# Allegro board DevPack_Debug.brd
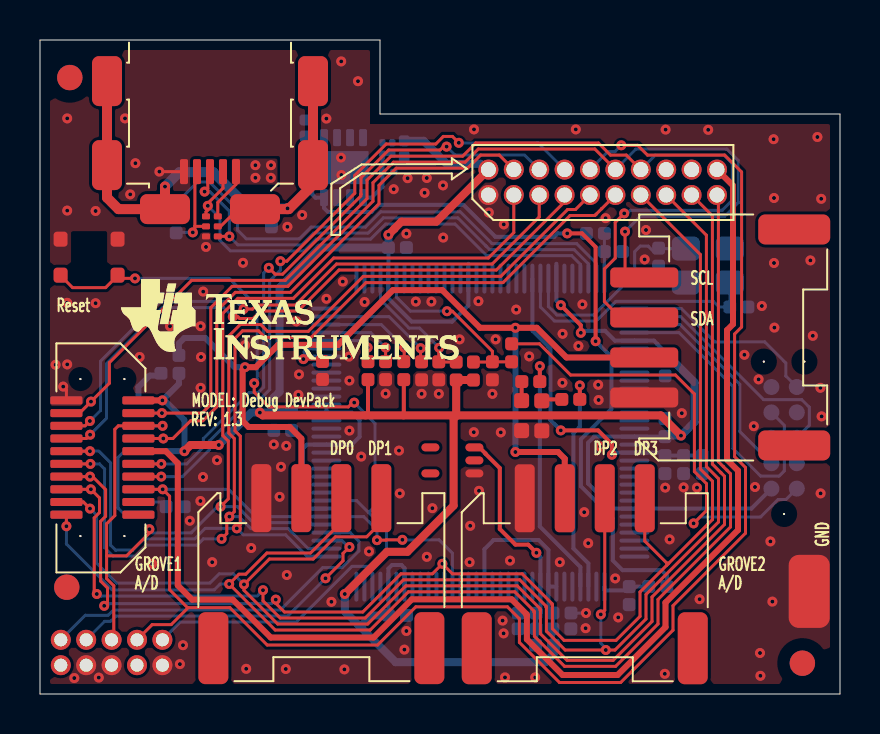
[diagram p0: board, top side]
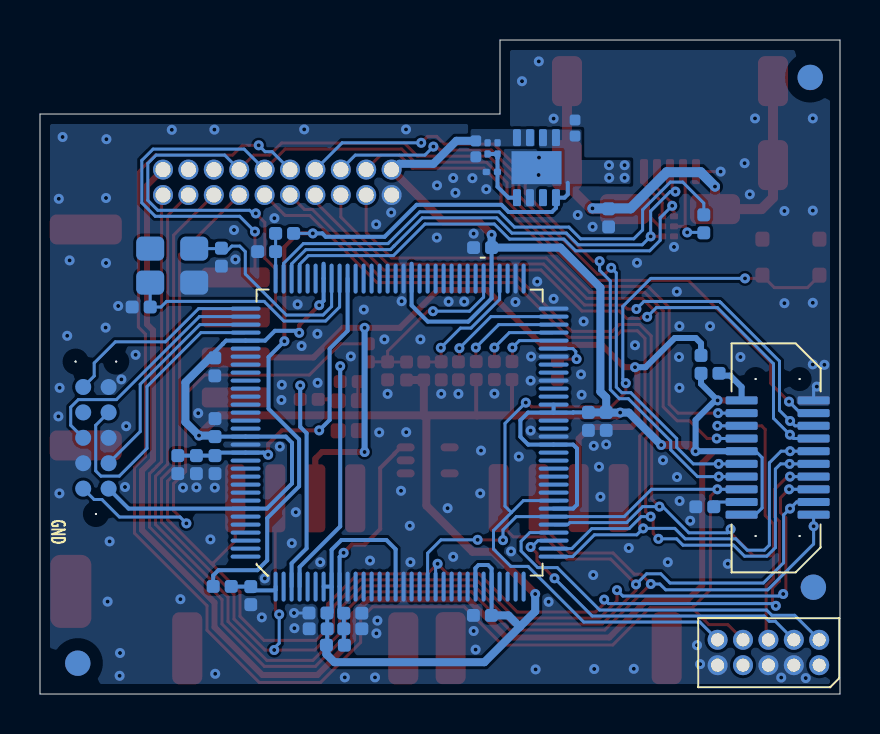
[diagram p1: board, bottom side, seen from below]

Outline 40 x 32.7 mm; copper layers: TOP, BOTTOM. Coordinates in mm from the lower left corner of the outline.
Outline path: 0,32.7 0,0 40,0 40,29 17,29 17,32.7 0,32.7

## Placement (name value [footprint] x y rotation side)
C1  10nF  [CAPC1005X60N]  17.43 3.93 0 bottom
C2  10nF  [CAPC1005X60N]  31.25 12.87 90 bottom
C3  10nF  [CAPC1005X60N]  31.26 16.81 270 bottom
C4  100nF  [CAPC1005X60N]  17.42 22.32 0 bottom
C5  100nF  [CAPC1005X60N]  12.58 14.08 270 bottom
C6  1uF  [CAPC1005X60N]  11.69 14.08 270 bottom
C7  0.1uF  [CAPC1005X60N]  31.25 11.92 270 bottom
C8  1uF  [CAPC1005X60N]  32.18 11.92 270 bottom
C9  2.2uF  [CAPC1005X60N]  33.11 11.92 270 bottom
C10  0.1uF  [CAPC1005X60N]  19.94 16.61 270 top
C11  1uF  [CAPC1005X60N]  25.64 3.26 0 bottom
C12  10nF  [CAPC1005X60N]  25.65 4.05 0 bottom
C13  12pF  [CAPC1005X60N]  34.49 19.35 0 bottom
C14  12pF  [CAPC1005X60N]  30.93 22.29 270 bottom
C15  10nF  [CAPC1005X60N]  24.81 3.26 180 bottom
C16  100nF  [CAPC1005X60N]  24.81 4.04 180 bottom
C17  2.2uF  [CAPC1005X60L]  13.25 27.9 90 bottom
C18  15pF  [CAPC0603X35L]  17.62 27.56 270 bottom
C19  2.2uF  [CAPC1005X60L]  18.21 27.66 270 bottom
C20  100nF  [CAPC1005X60N]  28.22 22.12 0 bottom
CR1  LS L296-P2Q2-1  [LEDC1708X67L]  25.09 13.16 90 top
CR2  LPL296-J2L2-25  [LEDC1707X65L]  24.08 13.17 90 top
CR3  TPD4E004DRY  [SON50P100X145X60-6N]  8.3 23.88 270 top
FIDU1  FIDU_1.27mm  [FID127X142]  1.49 30.82 0 top
FIDU2  FIDU_1.27mm  [FID127X142]  38.12 1.54 0 top
FIDU3  FIDU_1.27mm  [FID127X142]  1.34 5.34 0 top
FIDU4  FIDU_1.27mm  [FID127X142]  1.49 30.83 180 bottom
FIDU5  FIDU_1.27mm  [FID127X142]  1.33 5.34 180 bottom
FIDU6  FIDU_1.27mm  [FID127X142]  38.11 1.54 180 bottom
J1  LSS-110-01-F-DV-A-TR  [SAMTEC_LSS-110-01-F-DV-A-TR-20N]  1.32 14.68 0 bottom
J2  BB02-CN102-KB8-000000  [GRADCONN_BB02CN102KB8B]  1.04 1.44 90 bottom
J3  47491-0001  [MOLEX_474910001N]  9.8 26.12 90 top
J4  LSS-110-01-F-DV-A-TR  [SAMTEC_LSS-110-01-F-DV-A-TR-20N]  4.92 14.68 180 top
NOREF  -  []  0 30.1 0 top
NOREF#2  -  []  39.64 0 90 top
NOREF#3  -  []  17.56 29 90 top
NOREF#4  -  []  0 31.95 0 top
P1  TC2050-IDC-NL  [TAGCONNECT_TC2050IDCNLN]  36.57 10.27 90 bottom
P2  FTS-110-02-L-D  [SAMTEC_FTS11002LD-20B]  22.42 24.95 0 top
P3  1125R-SMT-4P  [TAIFENG_1125RSMT4PN]  11.07 9.79 270 top
P4  1125R-SMT-4P  [TAIFENG_1125RSMT4PN]  30.21 14.83 0 top
P5  1125R-SMT-4P  [TAIFENG_1125RSMT4PN]  24.24 9.79 270 top
R1  750k  [RESC1005X40N]  7.21 9.36 180 bottom
R2  51  [RESC1005X40N]  20.81 16.6 270 top
R3  10k  [RESC1005X40N]  21.67 16.6 270 top
R4  1k  [RESC1005X40N]  24.78 2.44 0 bottom
R6  33k  [RESC1005X40N]  11.57 23.36 90 bottom
R7  0  [RESC1005X40N]  6.81 23.06 90 bottom
R8  680  [RESC1005X40N]  26.09 14.73 0 top
R9  120  [RESC1005X40N]  24.09 15.62 0 top
R10  1k  [RESC1005X40N]  19.08 15.71 90 top
R11  1k  [RESC1005X40N]  18.19 15.72 90 top
R12  1k  [RESC1005X40N]  17.28 16.62 270 top
R13  330k  [RESC1005X40N]  30.44 5.38 0 bottom
R14  220k  [RESC1005X40N]  29.46 4.47 90 bottom
R15  100  [RESC1005X40N]  23.58 16.61 90 top
R16  DNM  [RESC1005X40N]  22.62 15.71 90 top
R17  1k  [RESC1005X40N]  16.4 16.62 270 top
R18  4.87k  [RESC1005X40N]  14.13 15.73 90 top
R19  0  [RESC1005X40AN]  6.95 16.03 90 bottom
R20  51k  [RESC0603X35L]  17.12 27 90 bottom
R21  30.1k  [RESC0603X35L]  17.69 26.1 180 bottom
R22  100  [RESC1005X40N]  27.32 23.03 0 bottom
SW1  TL3700AF160Q  [SW_TL3700AF160Q_A2L]  3.88 22.74 180 top
TP1  S1751-06  [TP_S1750]  38.46 5.13 90 top
U1  TM4C1294NCPDTT3R  [QFP40P1600X1600X120-128N]  28.22 5.37 180 bottom
U2  TPS79601DR  [SON65P300X300X100-9AL]  14.2 27.82 0 bottom
U3  LM4040B25IDCK  [SOT65P210X110-5N]  21.72 11.03 90 top
UNK#REFDES  -  []  5.05 20.74 0 top
Y1  16MHz  [OSCCC250X320X100-4BN]  34.49 20.57 180 bottom

## Library data of the parts
C1-C16 C20 = CAPACITOR: User Part Number: #PN; alternate symbols: (CAPC1005X60L,CAPC1005X60M)
C17 C19 = CAPACITOR: alternate symbols: (CAPC1005X60L,CAPC1005X60M)
C18 = CAPACITOR: alternate symbols: (CAPC0603X35L,CAPC0603X35M)
CR1 = LED: alternate symbols: (LEDC1708X67L,LEDC1708X67M)
CR2 = LED: alternate symbols: (LEDC1707X65L,LEDC1707X65M)
CR3 = DIODE_TPD4E004_SON6: User Part Number: #PN; alternate symbols: (SON50P100X145X65-6L,SON50P100X145X65-6M)
FIDU1-FIDU6 = FIDMARK
J1 J4 = CONN_SOCKET_2X10_J_V1: alternate symbols: (SAMTEC_LSS-110-01-F-DV-A-TR-20L,SAMTEC_LSS-110-01-F-DV-A-TR-20M)
J2 = CONN_HEADER_2X5_J_V1: User Part Number: #PN
J3 = CONN_USB_MICRO_5+6_S: User Part Number: #PN; alternate symbols: (MOLEX_474910001L,MOLEX_474910001M)
P1 = CONN_IDC_TC2050-IDC-NL: User Part Number: #PN; alternate symbols: (TAGCONNECT_TC2050IDCNLL,TAGCONNECT_TC2050IDCNLM)
P2 = CONN_HEADER_2X10_P_S: alternate symbols: (SAMTEC_FTS11002LD-20C,SAMTEC_FTS11002LD-20A)
P3-P5 = CONN_HEADER_4_P_2MH_V1: User Part Number: #PN; alternate symbols: (TAIFENG_1125RSMT4PL,TAIFENG_1125RSMT4PM)
R1-R4 R6-R18 R22 = RESISTOR: alternate symbols: (RESC1005X40L,RESC1005X40M)
R19 = RESISTOR_3PORTS: alternate symbols: (RESC1005X40AL,RESC1005X40AM,RESC1005X40BL,RESC1005X40BM)
R20 R21 = RESISTOR: alternate symbols: (RESC0603X35L,RESC0603X35M)
SW1 = SWITCH_TACT_V1: User Part Number: #PN; alternate symbols: (SW_TL3700AF160Q_A2L,SW_TL3700AF160Q_A2M)
TP1 = TEST_POINT
U1 = IC_PROC_TM4C1294NCPDT_TQFP128: alternate symbols: (QFP40P1600X1600X120-128L,QFP40P1600X1600X120-128M)
U2 = IC_PM_TPS79601_SON8: alternate symbols: (SON65P300X300X100-9AL,SON65P300X300X100-9AM)
U3 = IC_REF_LM4040_SC70-5: alternate symbols: (SOT65P210X110-5L,SOT65P210X110-5M)
Y1 = XTAL_4: alternate symbols: (OSCCC250X320X100-4BL,OSCCC250X320X100-4BM)

## Footprints (pads in the part's own frame, mm; a bottom-side part is the same pattern mirrored in y, then rotated)
CAPC0603X35L
  custom 0.36x0.32 smd: 1(0,0) 2(0.56,0)
CAPC1005X60L
  custom 0.55x0.54 smd: 1(0,0) 2(0.8,0)
CAPC1005X60N
  custom 0.65x0.64 smd: 1(0,0) 2(0.9,0)
FID127X142
  round 1.27 smd: 1(0,0)
GRADCONN_BB02CN102KB8B
  round 1 hole 0.65: 1(0,0) 2(1.27,0) 3(0,1.27) 4(1.27,1.27) 5(0,2.54) 6(1.27,2.54) 7(0,3.81) 8(1.27,3.81) 9(0,5.08) 10(1.27,5.08)
LEDC1707X65L
  custom 0.75x0.75 smd: 1(0,0) 2(1.5,0)
LEDC1708X67L
  custom 0.75x0.75 smd: 1(0,0) 2(1.5,0)
MOLEX_474910001N
  custom 1.25x0.4 smd: 1(0,0) 2(0,0.65) 3(0,1.3) 4(0,1.95) 5(0,2.6)
  custom 2.5x1.5 smd: 6(4.525,-3.85) 7(0.325,-3.85) 10(0.325,6.45) 11(4.525,6.45)
  custom 1.5x2.5 smd: 8(-1.875,-0.95) 9(-1.875,3.55)
OSCCC250X320X100-4BN
  custom 1.4x1.2 smd: 1(0,0) 2(2.2,0) 3(2.2,1.7) 4(0,1.7)
QFP40P1600X1600X120-128N
  oval 0.2x1.5 smd: 1(0,0) 2(0.4,0) 3(0.8,0) 4(1.2,0) 5(1.6,0) 6(2,0) 7(2.4,0) 8(2.8,0) 9(3.2,0) 10(3.6,0) 11(4,0) 12(4.4,0) 13(4.8,0) 14(5.2,0) 15(5.6,0) 16(6,0) 17(6.4,0) 18(6.8,0) 19(7.2,0) 20(7.6,0) 21(8,0) 22(8.4,0) 23(8.8,0) 24(9.2,0) 25(9.6,0) 26(10,0) 27(10.4,0) 28(10.8,0) 29(11.2,0) 30(11.6,0) 31(12,0) 32(12.4,0) 65(12.4,15.4) 66(12,15.4) 67(11.6,15.4) 68(11.2,15.4) 69(10.8,15.4) 70(10.4,15.4) 71(10,15.4) 72(9.6,15.4) 73(9.2,15.4) 74(8.8,15.4) 75(8.4,15.4) 76(8,15.4) 77(7.6,15.4) 78(7.2,15.4) 79(6.8,15.4) 80(6.4,15.4) 81(6,15.4) 82(5.6,15.4) 83(5.2,15.4) 84(4.8,15.4) 85(4.4,15.4) 86(4,15.4) 87(3.6,15.4) 88(3.2,15.4) 89(2.8,15.4) 90(2.4,15.4) 91(2,15.4) 92(1.6,15.4) 93(1.2,15.4) 94(0.8,15.4) 95(0.4,15.4) 96(0,15.4)
  oval 1.5x0.2 smd: 33(13.9,1.5) 34(13.9,1.9) 35(13.9,2.3) 36(13.9,2.7) 37(13.9,3.1) 38(13.9,3.5) 39(13.9,3.9) 40(13.9,4.3) 41(13.9,4.7) 42(13.9,5.1) 43(13.9,5.5) 44(13.9,5.9) 45(13.9,6.3) 46(13.9,6.7) 47(13.9,7.1) 48(13.9,7.5) 49(13.9,7.9) 50(13.9,8.3) 51(13.9,8.7) 52(13.9,9.1) 53(13.9,9.5) 54(13.9,9.9) 55(13.9,10.3) 56(13.9,10.7) 57(13.9,11.1) 58(13.9,11.5) 59(13.9,11.9) 60(13.9,12.3) 61(13.9,12.7) 62(13.9,13.1) 63(13.9,13.5) 64(13.9,13.9) 97(-1.5,13.9) 98(-1.5,13.5) 99(-1.5,13.1) 100(-1.5,12.7) 101(-1.5,12.3) 102(-1.5,11.9) 103(-1.5,11.5) 104(-1.5,11.1) 105(-1.5,10.7) 106(-1.5,10.3) 107(-1.5,9.9) 108(-1.5,9.5) 109(-1.5,9.1) 110(-1.5,8.7) 111(-1.5,8.3) 112(-1.5,7.9) 113(-1.5,7.5) 114(-1.5,7.1) 115(-1.5,6.7) 116(-1.5,6.3) 117(-1.5,5.9) 118(-1.5,5.5) 119(-1.5,5.1) 120(-1.5,4.7) 121(-1.5,4.3) 122(-1.5,3.9) 123(-1.5,3.5) 124(-1.5,3.1) 125(-1.5,2.7) 126(-1.5,2.3) 127(-1.5,1.9) 128(-1.5,1.5)
RESC0603X35L
  custom 0.36x0.32 smd: 1(0,0) 2(0.56,0)
RESC1005X40AN
  custom 0.64x0.65 smd: 1(0,-0.9)
  custom 0.65x0.64 smd: 2(0,0) 3(0.9,0)
RESC1005X40N
  custom 0.65x0.64 smd: 1(0,0) 2(0.9,0)
SAMTEC_FTS11002LD-20B
  round 1 hole 0.75: 1(0,0) 2(0,1.27) 3(1.27,0) 4(1.27,1.27) 5(2.54,0) 6(2.54,1.27) 7(3.81,0) 8(3.81,1.27) 9(5.08,0) 10(5.08,1.27) 11(6.35,0) 12(6.35,1.27) 13(7.62,0) 14(7.62,1.27) 15(8.89,0) 16(8.89,1.27) 17(10.16,0) 18(10.16,1.27) 19(11.43,0) 20(11.43,1.27)
SAMTEC_LSS-110-01-F-DV-A-TR-20N
  round 0.1 hole 0.9 unplated: (2.9,6.782) (2.9,-1.067)
  custom 1.6x0.4 smd: 1(0,0) 2(3.6,0) 3(0,0.635) 4(3.6,0.635) 5(0,1.27) 6(3.6,1.27) 7(0,1.905) 8(3.6,1.905) 9(0,2.54) 10(3.6,2.54) 11(0,3.175) 12(3.6,3.175) 13(0,3.81) 14(3.6,3.81) 15(0,4.445) 16(3.6,4.445) 17(0,5.08) 18(3.6,5.08) 19(0,5.715) 20(3.6,5.715)
SON50P100X145X60-6N
  custom 0.3x0.4 smd: 1(0,0) 2(0.5,0) 3(1,0) 4(1,0.59) 5(0.5,0.59) 6(0,0.59)
SON65P300X300X100-9AL
  custom 0.4x0.85 smd: 1(0,0) 2(0.65,0) 3(1.3,0) 4(1.95,0) 5(1.95,3) 6(1.3,3) 7(0.65,3) 8(0,3)
  rect 2.5x1.65 smd: 9(0.975,1.5)
SOT65P210X110-5N
  oval 0.4x0.9 smd: 1(0,0) 2(0.65,0) 3(1.3,0) 4(1.3,2.2) 5(0,2.2)
SW_TL3700AF160Q_A2L
  custom 0.7x0.75 smd: 1(0,0) 2(2.85,0) 3(0,1.8) 4(2.85,1.8)
TAGCONNECT_TC2050IDCNLN
  round 0.1 hole 1 unplated: (-1.27,0.635) (6.35,-0.38) (6.35,1.65)
  round 0.8 smd: 1(0,0) 2(1.27,0) 3(2.54,0) 4(3.81,0) 5(5.08,0) 6(5.08,1.27) 7(3.81,1.27) 8(2.54,1.27) 9(1.27,1.27) 10(0,1.27)
TAIFENG_1125RSMT4PN
  custom 3.4x1 smd: 1(0,0) 2(0,2) 3(0,4) 4(0,6)
  custom 3.6x1.5 smd: M1(7.5,-2.4) M2(7.5,8.4)
TP_S1750
  custom 3.65x2.05 smd: 1(0,0)

## Nets
GND: C1.2 C2.2 C3.2 C4.2 C5.2 C6.2 C7.2 C8.2 C9.2 C10.2 C11.2 C12.2 C13.2 C14.2 C15.2 C16.2 C17.2 C19.2 C20.2 CR1.1(C) CR2.1(C) CR3.3 J1.1 J2.3 J2.5 J2.9 J3.5(GND#5) J4.2 P1.3(7) P1.5(8) P1.9(10) P2.1 P3.1 P4.1 P5.1 R1.1 R6.1 R10.1 R12.2 R14.1 R16.1 R18.1 R21.1 SW1.1 SW1.2 TP1.1 U1.10(GNDA) U1.17(GND#17) U1.48(GND#48) U1.55(GND#55) U1.58(GND#58) U1.64(NWAKE) U1.66(XOSC0) U1.80(GND#80) U1.114(GND#114) U2.6(GND) U2.9(GND/TAB) U3.1(ANODE) Y1.2(GND)
VBUS_DETECT: R13.1 R14.2 U1.1(PD0/AIN15)
VDD: J1.2 R19.1
VDDC: C7.1 C8.1 C9.1 U1.87(VDDC#87) U1.115(VDDC#115)
DEVPACK_VDD: J4.9 P2.20
DP0: J1.19 J4.20 P2.19 P3.3
DP1: J1.17 J4.18 P2.17 P3.4
DP2: J1.15 J4.16 P2.15 P5.3
DP3: J1.13 J4.14 P2.13 P5.4 U1.21(PK3/AIN19)
DP6/AUDIO DO: J1.7 J4.8 P2.7
DP7/AUDIO_CLK: J1.5 J4.6 P2.5
DP9/MISO: J1.14 J4.13 P2.8
DP10/MOSI: J1.12 J4.11 P2.6
DP11/CSN: J1.8 J4.7 P2.4
DP_ID: J1.18 R1.2
GROVE VDD: P3.2 P4.2 P5.2 R19.3
IRSTN: P1.10(5) R15.2
ITCK: P1.4(2) U1.100(PC0/TCK/SWCLK)
ITDI: P1.8(4) U1.98(PC2/TDI)
ITDO: P1.6(3) U1.97(PC3/TDO/SWO)
ITMS: P1.2(1) U1.99(PC1/TMS/SWDIO)
LED0: R8.2 U1.3(PD2/AIN13)
LED1: R9.2 U1.4(PD3/AIN12)
SCL: J1.4 J4.3 P2.12 P4.4
SDA: J1.3 J4.4 P2.14 P4.3
VREFA+: C15.1 C16.1 R4.1 U1.9(VREFA+) U3.3(CATHODE)
XDSET_DM: CR3.1 J3.2(D-) U1.93(PL7/USB0DM)
XDSET_DP: CR3.4 J3.3(D+) U1.94(PL6/USB0DP)
XDSET_ID: CR3.2 J3.4(ID) R7.1
XDSET_RESET: J2.10 SW1.3 SW1.4 U1.40(PA6)
XDSET_RXD: J1.9 J4.10 P2.11 U1.33(PA0/U0RX)
XDSET_SHEILD: CR3.5 J3.6(GND#6) J3.7(GND#7) J3.8(GND#8) J3.9(GND#9) J3.10(GND#10) J3.11(GND#11) R6.2
XDSET_TCK: J2.4 U1.35(PA2/SSI0CLK)
XDSET_TDI: J1.16 J2.8 J4.15 P2.10 U1.20(PK2/AIN18) U1.38(PA5/SSI0XDAT1)
XDSET_TDO: J1.6 J2.6 J4.5 P2.3 U1.37(PA4/SSI0XDAT0)
XDSET_TMS: J2.2 U1.36(PA3/SSI0FSS)
XDSET_TXD: J1.11 J4.12 P2.9 U1.34(PA1/U0TX)
XDSET_VBUS: C17.1 CR3.6 J3.1(VBUS) R13.2 R22.1 U2.1(IN#1) U2.2(IN#2) U2.8(EN)
XDSET_VCC: C1.1 C2.1 C3.1 C4.1 C5.1 C6.1 C11.1 C12.1 C18.1 C19.1 J1.10 J1.20 J4.1 P1.1(6) P2.2 R2.2 R3.2 R4.2 R11.1 R17.2 R19.2 R20.2 U1.7(VDD#7) U1.8(VDDA) U1.16(VDD#16) U1.26(VDD#26) U1.28(VDD#28) U1.39(VDD#39) U1.47(VDD#47) U1.51(VDD#51) U1.52(VDD#52) U1.69(VDD#69) U1.79(VDD#79) U1.90(VDD#90) U1.101(VDD#101) U1.113(VDD#113) U1.122(VDD#122) U2.3(OUT#3) U2.4(OUT#4)
N632836: C10.1 R2.1 U1.68(VBAT)
N634757: R3.1 R15.1 R16.2 U1.70(NRST)
N637362: C13.1 U1.88(OSC0) Y1.1
N637369: C14.1 U1.89(OSC1) Y1.3
N653652: C20.1 R22.2 U1.96(PB1/USB0VBUS)
N653706: R7.2 U1.95(PB0/USB0ID)
N654664: CR1.2(A) R8.1
N654708: CR2.2(A) R9.1
N655244: R10.2 U1.63(PK4)
N655248: R11.2 U1.62(PK5)
N655252: R12.1 U1.61(PK6)
N686578: R17.1 U1.60(PK7)
N726237: R18.2 U1.59(RBIAS)
N743940: C18.2 R20.1 R21.2 U2.5(FB)

Pads without a net: FIDU1 1; FIDU2 1; FIDU3 1; FIDU4 1; FIDU5 1; FIDU6 1; J2 1 7; J4 17 19; P1 7; P2 16 18; P3 M1 M2; P4 M1 M2; P5 M1 M2; U1 2 5 6 11 12 13 14 15 18 19 22 23 24 25 27 29 30 31 32 41 42 43 44 45 46 49 50 53 54 56 57 65 67 71 72 73 74 75 76 77 78 81 82 83 84 85 86 91 92 102 103 104 105 106 107 108 109 110 111 112 116 117 118 119 120 121 123 124 125 126 127 128; U2 7; U3 2 4 5; Y1 4

## Via types
v1: diameter 0.5, hole 0.2, TOP to BOTTOM, 225 vias

## Routing (per net, layer and track width the routed paths; a pad name or vN(x,y) marks a point on that pad's centre or on a via; arc(x,y) is an arc through that point)
GND: length 3.7
  TOP w0.15: 6.88,1.44 6.93,1.49 v1(7,1.49) ; J3.5 v1(5.97,26.12) ; v1(1.16,15.37) 1.32,15.21 J4.2
  BOTTOM w0.15: C12.2 v1(27.3,4.05) ; 27.35,7.58 27.39,7.54 v1(27.41,7.54) ; J4.2 1.32,15.21 v1(1.16,15.37)
  vias: v1(0.78,16.46) v1(1.36,28.78) v1(1.36,24.17) v1(1.36,19.56) v1(1.36,16.48) v1(1.71,0.8) v1(2.78,24.15) v1(2.78,19.54) v1(2.94,0.82) v1(4.25,28.78) v1(4.51,24.98) v1(4.77,26.54) v1(4.98,16.85) v1(5.61,6.51) v1(6.5,18.39) v1(7.15,2.44) v1(7.49,8.66) v1(8.03,18.39) v1(8.03,15.31) v1(8.02,9.65) v1(8.05,16.85) v1(8.16,20.12) v1(8.15,10.85) v1(8.3,22.35) v1(8.61,6.59) v1(8.85,11.69) v1(10.15,21.56) v1(10.25,17.44) v1(10.31,1.26) v1(10.56,7.3) v1(11.69,12.48) v1(11.98,9.86) v1(12.05,11.36) v1(12.31,12.41) v1(12.34,5.95) v1(12.29,1.25) v1(12.37,23.36) v1(12.82,18.63) v1(12.95,15.98) v1(12.92,14.96) v1(13.11,23.95) v1(14.32,28.77) v1(14.32,19.76) v1(14.57,4.61) v1(15.06,31.63) v1(15.05,26.82) v1(15.07,25.95) v1(15.14,20.62) v1(15.22,1.23) v1(15.45,16.87) v1(15.47,15.67) v1(15.47,13.17) v1(15.9,30.64) v1(16.06,11.87) v1(16.23,19.6) v1(16.45,7.13) v1(17.28,15.02) v1(17.69,25.24) v1(17.95,12.17) v1(17.99,10.03) v1(18.22,2.22) v1(18.32,23.02) v1(18.32,3.15) v1(18.38,25.79) v1(18.79,19.62) v1(19.08,15.01) v1(19.23,25.06) v1(19.34,25.8) v1(19.34,6.86) v1(19.57,19.62) v1(19.62,9.29) v1(19.94,15.01) v1(20.15,25.43) v1(20.16,22.82) v1(20.98,17.73) v1(21.51,8.41) v1(21.48,6.59) v1(21.7,28.23) v1(21.69,13.09) v1(21.92,19.64) v1(21.95,10.16) v1(22.44,24.07) v1(22.62,15.01) v1(22.78,17.73) v1(23.04,13.08) v1(23.13,3.67) v1(23.19,23.48) v1(23.18,3.03) v1(23.25,0.83) v1(23.5,6.67) v1(23.81,19.22) v1(24.46,16.88) v1(24.76,0.83) v1(25.99,6.59) v1(26.13,18.01) v1(26.12,15.56) v1(26.79,28.23) v1(26.92,17.4) v1(27.12,19.48) v1(27.21,9.09) v1(27.28,3.29) v1(27.91,15.46) v1(27.93,14.7) v1(28.01,12.37) v1(28.28,23.79) v1(28.76,5.78) v1(28.91,3.83) v1(30.23,21.73) v1(30.3,23.2) v1(31.24,1.01) v1(31.28,28.22) v1(31.26,10.32) v1(31.48,7.73) v1(32.09,14.04) v1(32.18,10.33) v1(32.85,10.32) v1(32.98,4.74) v1(33.41,28.21) v1(35.22,16.96) v1(35.69,13.39) v1(35.75,10.35) v1(35.93,15.73) v1(36,2.05) v1(36.02,0.91) v1(36.09,19.4) v1(36.52,7.63) v1(36.62,4.62) v1(36.68,27.74) v1(36.7,24.8) v1(36.7,21.55) v1(36.72,18.32) v1(38.52,21.68) v1(38.64,17.91) v1(38.87,27.85) v1(39.02,15.31) v1(39.03,10.03) v1(39.06,24.76) v1(39.08,13.88)
VBUS_DETECT: length 2.6
  BOTTOM w0.2: 30.43,5.37 R14.2 29.27,5.18 28.25,5.18 28.22,5.21 U1.1 ; 30.43,5.37 30.51,5.37 30.52,5.38 ; 30.43,5.37 R13.1
VDD: length 2.1
  BOTTOM w0.3: R19.1 5.94,15.92 5.49,15.92 4.92,15.35 J1.2
VDDC: length 16.2
  TOP w0.2: v1(28.59,11.96) 28.59,12.49 27.91,13.18 v1(26.04,13.18)
  BOTTOM w0.2: v1(28.59,11.96) 28.71,11.96 28.82,12.07 U1.115 31.1,12.07 C7.1 C8.1 C9.1 ; v1(26.04,13.18) 25.52,13.7 25.52,17.26 24.62,18.16 U1.87
DEVPACK_VDD: length 62.9
  TOP w0.3: J4.9 6.29,12.14 6.89,11.54 6.89,5.43 7.6,4.72 9.64,4.72 11.53,2.83 16.68,2.83 18.59,4.74 23.58,4.74 24.33,3.99 24.33,3.93 24.34,3.92 24.34,2.73 26.13,0.95 28.88,0.95 31.28,3.35 31.28,4.57 34.9,8.2 34.9,8.51 34.9,8.76 34.9,11.17 34.35,11.72 34.35,18.19 34.65,18.49 34.65,25.42 P2.20
DP0: length 68.9
  TOP w0.15: J4.20 v1(1.32,8.39) ; P3.3 15.07,8.59 13.53,7.05 11.35,7.05 10.29,5.99 9.95,5.99 v1(9.46,5.5) 11.76,3.2 16.51,3.2 18.42,5.11 23.74,5.11 24.7,4.14 24.7,4.09 24.72,4.07 24.72,2.89 26.23,1.38 28.78,1.38 30.9,3.5 30.9,4.73 34.53,8.35 34.53,8.6 34.52,8.6 34.52,11.01 34.35,11.19 34.17,11.36 33.92,11.62 33.92,24.88 P2.19 33.85,24.93
  BOTTOM w0.15: v1(9.46,5.5) 9.01,5.5 8.72,5.21 3.61,5.21 1.32,7.5 v1(1.32,8.39) J4.20
DP1: length 71.8
  TOP w0.15: v1(2.5,9.27) 2.17,9.6 J4.18 ; P2.17 33.62,23.91 33.62,11.49 34.05,11.06 34.23,10.89 34.23,8.48 30.6,4.85 30.6,3.63 28.65,1.68 26.35,1.68 25.02,3.01 25.02,4.2 25.01,4.21 25.01,4.27 23.86,5.41 18.3,5.41 16.39,3.5 11.88,3.5 10.2,5.18 v1(10.2,5.48) 11.47,6.75 13.66,6.75 14.77,7.86 16.34,7.86 17.07,8.59 P3.4
  BOTTOM w0.15: v1(10.2,5.48) 9.67,6.01 8.96,6.01 8.5,5.55 3.83,5.55 2.82,6.56 2.82,8.95 v1(2.5,9.27) 2.17,9.6 J4.18
DP2: length 71.7
  TOP w0.15: v1(28.04,3.98) 28.04,3.99 28.24,4.19 P5.3 ; P2.15 33.32,22.94 33.32,11.37 33.92,10.76 33.92,8.6 30.3,4.98 30.3,3.75 28.75,2.2 v1(28.29,2.2) 26.26,2.2 25.32,3.14 25.32,4.32 25.31,4.34 25.31,4.39 23.99,5.71 18.17,5.71 16.26,3.8 12.01,3.8 11.15,4.66 v1(11.15,5.19) ; J4.16 v1(2.54,10.23) 2.98,9.8 2.98,9.07 2.71,8.81 2.71,5.16 2.84,5.03 v1(2.84,5)
  BOTTOM w0.15: v1(28.04,3.98) 28.04,2.54 28.29,2.29 v1(28.29,2.2) ; J4.16 v1(2.54,10.23) ; v1(2.84,5) 2.97,5 3.07,4.9 10.86,4.9 v1(11.15,5.19)
DP3: length 69.7
  TOP w0.15: J4.14 v1(2.5,10.87) 2.63,10.87 3.28,10.22 3.28,8.88 3.03,8.63 3.03,5.65 3.38,5.3 3.38,4.58 v1(3.21,4.41) ; 31.44,6.54 33.62,8.72 33.62,10.64 33.02,11.24 33.02,21.97 P2.13 ; 31.44,6.54 31.34,6.54 30.24,7.65 P5.4 ; 31.44,6.54 31.34,6.44 30,5.1 30,3.88 28.8,2.68 26.2,2.68 25.62,3.26 25.62,4.45 25.61,4.46 25.61,4.51 24.11,6.01 20.62,6.01 v1(20.12,6.51) 19.62,6.01 18.05,6.01 16.14,4.1 12.22,4.1 11.79,4.53 v1(11.79,4.72)
  BOTTOM w0.15: v1(20.12,6.51) 20.22,6.41 U1.21 ; v1(11.79,4.72) 11.77,4.72 11.57,4.52 3.32,4.52 v1(3.21,4.41) ; J4.14 v1(2.5,10.87)
DP6/AUDIO DO: length 33.5
  TOP w0.15: v1(9.64,18.86) 9.9,18.86 9.98,18.77 10.65,18.77 11.03,19.15 12.9,19.15 14.95,21.2 22.82,21.2 26.23,24.61 P2.7 ; v1(2.5,12.96) 2.31,12.78 J4.8
  BOTTOM w0.15: J4.8 2.31,12.78 v1(2.5,12.96) 3.33,13.79 3.33,16.52 6.13,19.32 9.18,19.32 v1(9.64,18.86)
DP7/AUDIO_CLK: length 32.1
  TOP w0.15: v1(10.18,19.25) 10.63,19.25 10.83,19.45 12.78,19.45 14.83,21.5 22.61,21.5 24.96,23.85 P2.5 ; v1(2.49,13.65) 2.49,13.65 2.25,13.41 J4.6
  BOTTOM w0.15: v1(10.18,19.25) 9.8,19.63 6.03,19.63 5.98,19.58 5.97,19.58 3.02,16.64 3.02,14.18 v1(2.49,13.65) 2.49,13.65 2.25,13.41 J4.6
DP9/MISO: length 34.4
  TOP w0.15: J4.13 v1(6.06,10.87) ; v1(12.02,21.64) 12.34,21.64 15.74,25.04 15.74,25.93 17.31,27.5 19.79,27.5 20.17,27.88 20.62,27.88 v1(20.94,27.56)
  BOTTOM w0.15: J4.13 v1(6.06,10.87) 7.12,10.87 8.46,12.21 8.46,12.65 10.58,14.76 11.03,14.76 11.48,15.22 11.48,20.65 12.02,21.19 v1(12.02,21.64) ; v1(20.94,27.56) 24.89,27.56 P2.8
DP10/MOSI: length 32.6
  TOP w0.15: J4.11 v1(6.07,11.51) ; v1(11.44,21.31) 11.76,20.99 12.13,20.99 16.04,24.9 16.04,24.98 16.05,24.99 16.05,25.82 17.43,27.2 20,27.2 20.17,27.37 v1(20.33,27.37)
  BOTTOM w0.15: v1(11.44,21.31) 11.19,21.05 11.19,15.34 10.91,15.06 10.46,15.06 8.16,12.77 8.16,12.33 7.34,11.51 v1(6.07,11.51) J4.11 ; v1(20.33,27.37) 20.75,26.95 24.23,26.95 P2.6
DP11/CSN: length 29.5
  TOP w0.15: P2.4 22.96,26.95 22.03,26.95 21.38,26.29 17.81,26.29 16.95,25.43 16.95,24.51 12.52,20.08 9.77,20.08 8.84,19.16 8.84,14.36 8.14,13.66 7.53,13.66 6.64,12.78 v1(6.17,12.78) J4.7
  BOTTOM w0.15: J4.7 v1(6.17,12.78)
DP_ID: length 1.7
  BOTTOM w0.15: J1.18 6.34,9.6 6.31,9.57 R1.2
GROVE VDD: length 47.4
  TOP w0.3: P5.2 26.24,11.76 25.9,12.1 v1(23.77,12.1) ; P4.2 26.32,16.83 24.84,18.31 v1(23.77,18.31) 22,18.31 20.11,20.2 17.64,20.2 14.9,17.45 11.9,17.45 10.79,16.34 v1(10.25,16.34) 10.13,16.22 10.13,13.65 10.43,13.35 12.49,13.35 13.07,12.77 P3.2
  BOTTOM w0.3: v1(23.77,12.1) v1(23.77,18.31) ; R19.3 6.95,17.53 7.21,17.8 8.26,17.8 9.72,16.34 v1(10.25,16.34)
IRSTN: length 23
  TOP w0.15: R15.2 24.97,17.51 26.53,15.95 31.77,15.95 32.72,15 32.72,11.12 33.33,10.51 33.33,9.18 v1(32.68,8.53)
  BOTTOM w0.15: v1(32.68,8.53) 33,8.85 36.03,8.85 36.9,9.72 37.3,9.72 P1.10
ITCK: length 15.6
  BOTTOM w0.15: P1.4 37.22,13.44 37.22,11.15 36.95,10.89 36.03,10.89 34.65,12.28 34.65,15.37 31.95,18.07 U1.100
ITDI: length 12.4
  BOTTOM w0.15: U1.98 32.03,18.87 36.18,14.72 38.08,14.72 38.47,14.34 38.47,13.44 P1.8
ITDO: length 10.1
  BOTTOM w0.15: P1.6 37.29,15.9 37.29,16.55 36.23,17.61 33.73,17.61 32.07,19.27 U1.97
ITMS: length 11.1
  BOTTOM w0.15: U1.99 32.01,18.47 34.99,15.49 34.99,13.12 P1.2
LED0: length 11.2
  TOP w0.2: v1(26.99,15.43) R8.2
  BOTTOM w0.2: v1(26.99,15.43) 26.99,13.36 26.67,13.04 26.67,7.28 27.42,6.53 U1.3
LED1: length 12.6
  TOP w0.2: R9.2 v1(24.99,16.39)
  BOTTOM w0.2: U1.4 27.02,6.35 24.99,8.38 v1(24.99,16.39)
SCL: length 52.6
  TOP w0.15: J4.3 v1(6.1,14.04) 8.1,14.04 8.54,14.49 8.54,19.32 9.6,20.38 12.39,20.38 12.39,20.39 12.4,20.39 16.65,24.64 16.65,25.57 17.67,26.59 21.25,26.59 21.91,27.25 27.74,27.25 P2.12 ; v1(29.25,23.12) 29.25,20.98 29.4,20.83 P4.4
  BOTTOM w0.15: v1(29.25,23.12) 30.02,23.89 33.99,23.89 34.23,23.88 34.91,24.56 34.91,26.68 34.34,27.25 29.8,27.25 P2.12 ; v1(6.1,14.04) J4.3
SDA: length 57.2
  TOP w0.15: P4.3 29.01,18.83 28.22,19.62 28.22,21.25 28.76,21.79 28.76,23.58 v1(29.21,24.03) ; J4.4 1.98,14.04 v1(2.55,14.62) 3.47,15.54 3.47,16.57 7.58,20.68 12.26,20.68 16.35,24.77 16.35,25.69 17.55,26.89 21.13,26.89 21.79,27.55 27.92,27.55 28.52,26.95 29.32,26.95 P2.14
  BOTTOM w0.15: v1(2.55,14.62) 1.98,14.04 J4.4 ; v1(29.21,24.03) 29.36,24.03 29.52,24.18 34.11,24.18 34.61,24.68 34.61,26.53 34.2,26.95 30.77,26.95 P2.14
VREFA+: length 12
  TOP w0.2: v1(24.82,7.06) 24.41,7.47 23.77,7.47 22.99,8.25 22.99,11.3 22.27,12.01 22.27,12.03 21.97,12.33 U3.3
  BOTTOM w0.15: 25.02,4.06 25,4.04 C16.1
  BOTTOM w0.2: R4.1 24.78,2.58 24.81,2.61 C15.1 C16.1 ; v1(24.82,7.06) 25.02,6.86 U1.9 25.02,4.06
XDSET_DM: length 24.9
  TOP w0.15: J3.2 9.15,25.29 8.39,24.53 v1(8.39,24.41) 8.39,24.2 8.3,24.11 CR3.1
  BOTTOM w0.15: v1(8.39,24.41) 8.99,23.81 8.99,22.68 9.52,22.16 13.22,22.16 13.8,22.75 16.53,22.75 17.28,23.5 20.75,23.5 22.33,21.92 26.58,21.92 27.02,21.48 U1.93
XDSET_DP: length 25
  TOP w0.15: J3.3 8.49,26.12 8.39,26.02 8.39,25.27 8.24,25.12 v1(8.23,25.12) ; CR3.4 v1(9.47,22.88)
  BOTTOM w0.15: U1.94 27.42,21.51 26.71,22.22 22.48,22.22 22.3,22.4 20.89,23.81 17.17,23.81 16.4,23.05 13.68,23.05 13.09,22.46 9.89,22.46 v1(9.47,22.88) 9.47,24.14 8.49,25.12 v1(8.23,25.12)
XDSET_ID: length 4.6
  TOP w0.15: 7.74,23.39 7.75,23.38 CR3.2 ; 7.74,23.39 7.74,26.01 J3.4 ; 7.74,23.39 7.74,23.18 v1(7.64,23.08)
  BOTTOM w0.15: v1(7.64,23.08) 6.83,23.08 ; 6.83,23.08 6.78,23.08 6.74,23.04 ; 6.83,23.08 R7.1
XDSET_RESET: length 44.8
  TOP w0.15: v1(4.75,20.78) 4.04,20.78 SW1.3 3.88,20.92 3.28,20.32 1.63,20.32 1.03,20.92 SW1.4 ; v1(15.71,14.57) 15.63,14.57 15.41,14.36 11.44,14.36 10.71,15.09 v1(10.71,15.54)
  BOTTOM w0.15: v1(15.71,14.57) 16.75,13.53 16.75,9.39 16.43,9.07 ; v1(10.71,15.54) 10.71,15.59 10.86,15.74 10.86,19.38 9.46,20.78 v1(4.75,20.78) ; J2.10 7.01,3.6 12.82,3.6 15.6,6.38 16.46,6.38 17.32,7.25 17.32,8.18 16.43,9.07 ; 16.43,9.07 15.83,9.67 U1.40 14.04,9.67
XDSET_RXD: length 51.6
  TOP w0.15: v1(9.84,8.28) 10.02,8.46 10.02,12.9 9.75,13.16 9.75,17.78 10.13,18.16 10.93,18.16 11.26,17.83 13.56,17.83 16.3,20.57 23.15,20.57 26.5,23.93 27.75,23.93 27.8,23.98 27.8,23.99 28.08,24.27 P2.11 ; J4.10 v1(2.5,12.14)
  BOTTOM w0.15: U1.33 13.37,6.87 12.28,7.96 10.16,7.96 v1(9.84,8.28) 8.26,8.28 7.74,7.76 5.21,7.76 4.64,7.19 3.78,7.19 3.53,7.44 3.53,11.56 2.95,12.14 v1(2.5,12.14) J4.10
XDSET_SHEILD: length 28.1
  TOP w0.15: J3.8 9.89,24.25 9.03,23.38 CR3.5
  TOP w0.5: 12.34,24.25 v1(12.38,24.28) ; 12.34,24.25 12.44,24.25 13.65,25.46 J3.7 13.65,30.64 ; 12.34,24.25 J3.8 ; v1(6.25,25.37) J3.9 3.92,24.25 3.35,24.82 J3.10 3.35,30.64
  BOTTOM w0.5: v1(6.25,25.37) 6.97,26.09 8.66,26.09 10.47,24.28 11.59,24.28 ; v1(12.38,24.28) 11.59,24.28 ; 11.59,24.28 R6.2
XDSET_TCK: length 17.1
  TOP w0.15: v1(15.47,7.35) 15.15,7.03 15.15,6.66 v1(14.28,5.79)
  BOTTOM w0.15: v1(14.28,5.79) 12.39,3.9 3.8,3.9 3.53,3.63 3.23,3.63 J2.4 2.31,2.76 2.39,2.84 ; 13.94,7.67 U1.35 15.1,7.67 15.42,7.35 v1(15.47,7.35)
XDSET_TDI: length 92.5
  TOP w0.15: 7.41,4.32 7.38,4.32 6.48,5.21 6.48,9.89 v1(6.13,10.23) J4.15 ; 7.41,4.32 9.49,4.32 11.36,2.45 16.88,2.45 18.79,4.36 23.37,4.36 23.97,3.76 23.97,2.89 23.97,2.58 25.97,0.57 29.03,0.57 31.65,3.19 31.65,4.42 35.28,8.04 35.28,8.35 35.28,8.66 35.28,8.66 35.28,8.91 35.27,11.32 34.73,11.87 34.73,18 35.08,18.35 35.08,26.1 34.23,26.95 30.38,26.95 29.89,27.43 v1(29.07,27.43) ; 7.41,4.32 6.56,3.47 5.61,3.47 J2.8 ; v1(18.12,7.71) 17.32,7.71 17.3,7.69 v1(16.85,7.69)
  BOTTOM w0.15: v1(18.12,7.71) 19.95,7.71 20.62,7.04 U1.20 ; P2.10 28.4,27.12 28.75,27.12 v1(29.07,27.43) ; v1(16.85,7.69) 16.85,8.21 16.19,8.87 U1.38 10.79,8.87 9.43,10.23 v1(6.13,10.23) J4.15
XDSET_TDO: length 55.3
  TOP w0.15: v1(5.47,8.24) 5.47,8.05 4.33,6.91 3.33,6.91 ; J2.6 3.58,2.79 3.69,2.9 3.69,5.41 3.33,5.77 3.33,6.91 ; v1(6.13,13.41) J4.5 3.92,13.41 3.74,13.23 3.74,8.92 3.33,8.51 3.33,6.91 ; P2.3 23.69,23.07 22.42,21.8 14.68,21.8 12.67,19.78 9.89,19.78 9.14,19.03 9.14,13.4 9.14,12.92 9.41,12.65 9.41,9.76 v1(9.03,9.37)
  BOTTOM w0.15: v1(5.47,8.24) 5.47,8.21 5.62,8.06 7.56,8.06 8.87,9.37 v1(9.03,9.37) 9.87,9.37 10.67,8.57 13.51,8.57 13.61,8.47 U1.37 ; J4.5 v1(6.13,13.41)
XDSET_TMS: length 19
  BOTTOM w0.15: 14.31,8.07 U1.36 15.51,8.07 15.95,7.63 15.95,7.15 15.11,6.32 14.14,6.32 12.02,4.2 3.67,4.2 3.41,3.94 2.27,3.94 J2.2
XDSET_TXD: length 50.8
  TOP w0.15: v1(9.08,7.76) 9.34,8.02 9.34,8.74 v1(9.47,8.87) 9.71,9.12 9.71,12.77 9.44,13.05 9.44,17.9 10.01,18.48 11.04,18.48 11.38,18.13 13.41,18.13 16.16,20.88 23.04,20.88 26.38,24.23 26.77,24.23 P2.9 ; v1(2.52,11.51) J4.12
  BOTTOM w0.15: v1(9.08,7.76) 8.17,7.76 7.85,7.44 5.32,7.44 4.77,6.89 3.66,6.89 3.23,7.32 3.23,11.25 2.97,11.51 v1(2.52,11.51) J4.12 ; U1.34 13.41,7.27 12.41,8.27 10.54,8.27 9.94,8.87 v1(9.47,8.87)
XDSET_VBUS: length 41
  TOP w0.15: J3.1 9.8,25.49 8.89,24.58 CR3.6
  TOP w0.2: v1(27.78,17.64) 27.78,22.35 27.1,23.03 v1(26.36,23.03)
  BOTTOM w0.15: v1(26.36,23.03) R22.1
  BOTTOM w0.2: 13.61,25.56 13.61,24.98 13.78,24.82 U2.8 14.2,24.3 14.4,24.1 16.57,24.1 16.93,24.46 21.17,24.46 22.77,22.86 25.71,22.86 25.88,23.03 v1(26.36,23.03) ; v1(27.78,17.64) 28.57,16.85 28.57,14.26 27.05,12.73 27.05,10.38 28.64,8.79 28.64,6.68 29.13,6.19 31.08,6.19 31.34,5.93 R13.2
  vias: v1(10.77,26.44) v1(10.77,25.81) v1(11.54,25.81) v1(11.55,26.44)
XDSET_VCC: length 165.3
  TOP w0.2: 16.27,13.93 16.4,14.06 R17.2 ; v1(26.04,19.44) 27.04,18.44 v1(27.04,18.06) ; R11.1 18.19,13.95 18.17,13.93
  TOP w0.3: J4.1 v1(6.12,14.68)
  TOP w0.4: 20.84,13.93 31.04,13.93 v1(32.05,12.92) ; 20.84,13.93 20.81,13.96 R2.2 R3.2 ; 20.84,13.93 11.13,13.93 v1(10.99,14.07) ; 20.84,13.93 20.68,13.77 20.68,9.42 18.37,7.11 17.35,7.11 v1(15.24,5) ; v1(17.42,22.96) 17.72,23.26 17.72,23.27 18.07,23.62 19.82,23.62 P2.2 ; v1(8.94,12.45) 7.53,12.45 v1(7.22,12.14) 7.25,12.14
  BOTTOM w0.15: J1.20 4.23,8.96 3.9,9.3 3.9,11.82 4.21,12.14 J1.10 ; 25.42,4.06 25.43,4.05 C12.1 ; 11.68,14.07 C6.1
  BOTTOM w0.2: U1.51 U1.52 ; U1.51 13.34,14.07 13.33,14.08 C5.1 ; U1.51 15.6,14.07 15.98,13.69 15.98,12.86 15.59,12.47 U1.47 13.34,12.47 13.15,12.28 13.15,9.46 13.34,9.27 U1.39 ; U1.26 18.23,5.38 18.23,6.29 18.07,6.45 17.6,6.45 17.42,6.27 U1.28 17.42,3.94 C1.1 ; C3.1 31.26,17.1 30.86,17.5 30.86,17.51 30.7,17.67 U1.101 28.74,17.67 28.25,18.16 27.14,18.16 v1(27.04,18.06) ; R4.2 25.64,2.48 C11.1 25.64,4.04 C12.1 ; C4.1 U1.69 17.42,19.78 18.58,18.62 20.61,18.62 21.42,19.43 U1.79 21.42,21.52 ; C2.1 U1.113 27.71,12.87 27.4,12.56 27.4,10.53 28.66,9.27 U1.122 35.57,9.27 P1.1 ; 25.82,21.52 U1.90 25.82,19.66 v1(26.04,19.44) ; U1.8 U1.7 ; U1.8 25.42,7.21 24.93,7.7 22.68,7.7 22.22,7.24 U1.16 ; U1.8 25.42,4.06
  BOTTOM w0.3: R19.2 6.95,15.51 v1(6.12,14.68) 6.24,14.68 7.22,13.7 v1(7.22,12.14) J1.10
  BOTTOM w0.4: C5.1 11.92,14.08 11.91,14.07 v1(10.99,14.07) 10.56,14.07 v1(8.94,12.45) ; C3.1 31.5,16.81 32.73,15.58 32.73,13.6 v1(32.05,12.92) 31.3,12.92 C2.1 ; C6.1 11.69,14.82 11.98,15.11 11.98,20.32 13.98,22.32 C4.1 v1(17.42,22.96) ; P2.2 22.32,26.22 22.03,26.51 20.33,26.51 19.18,27.66 C19.1 ; C1.1 16.58,3.93 16.01,3.36 ; 16.01,3.36 15.24,4.13 v1(15.24,5) ; 16.01,3.36 17.78,1.59 25.28,1.59 25.68,1.99 R4.2
N632836: length 6.6
  TOP w0.15: R2.1 19.95,16.6 C10.1 19.94,17.19 19.96,17.21 v1(19.96,17.31)
  BOTTOM w0.15: U1.68 17.02,19.72 18.45,18.3 18.98,18.3 v1(19.96,17.31)
N634757: length 9.3
  TOP w0.15: R3.1 22.61,16.6 R16.2 ; R16.2 22.62,17.14 20.62,19.14 v1(20.35,19.14) ; R16.2 R15.1
  BOTTOM w0.15: v1(20.35,19.14) 18.52,19.14 17.82,19.84 U1.70
N637362: length 12.9
  BOTTOM w0.15: Y1.1 C13.1 33.95,19.35 33.67,19.63 28.79,19.63 27.81,18.65 25.72,18.65 25.02,19.35 U1.88
N637369: length 10.8
  BOTTOM w0.15: Y1.3 30.95,22.27 C14.1 30.93,22.19 30.85,22.12 30.68,22.12 30.41,22.39 30.01,22.39 29.73,22.12 29.73,21 27.69,18.95 25.84,18.95 25.42,19.37 U1.89
N653652: length 2.3
  BOTTOM w0.15: R22.2 C20.1 U1.96
N653706: length 26.2
  BOTTOM w0.15: R7.2 6.81,24.54 7.87,25.59 8.48,25.59 9.87,24.21 9.87,23.2 10.31,22.76 12.97,22.76 13.56,23.34 16.27,23.34 17.04,24.11 21.01,24.11 22.6,22.52 26.83,22.52 27.82,21.53 U1.95
N654664: length 1
  TOP w0.2: CR1.2 25.16,14.73 R8.1
N654708: length 1
  TOP w0.2: R9.1 24.08,15.61 CR2.2
N655244: length 6.1
  TOP w0.15: R10.2 19.03,16.66 v1(19.03,17.29)
  BOTTOM w0.15: U1.63 17.45,18.87 v1(19.03,17.29)
N655248: length 5.1
  TOP w0.15: v1(18.21,17.32) 18.21,16.64 R11.2
  BOTTOM w0.15: v1(18.21,17.32) 17.06,18.47 U1.62
N655252: length 4
  TOP w0.15: 17.26,16.64 R12.1 ; R12.1 v1(17.28,17.32) ; R12.1 17.29,16.63
  BOTTOM w0.15: v1(17.28,17.32) 16.53,18.07 U1.61
N686578: length 2.9
  TOP w0.15: 16.38,16.64 R17.1 ; 16.38,16.64 16.37,16.65 ; 16.38,16.64 v1(16.38,17.32)
  BOTTOM w0.15: U1.60 16.03,17.67 v1(16.38,17.32)
N726237: length 2.6
  TOP w0.15: R18.2 14.01,16.74 v1(13.17,16.74)
  BOTTOM w0.15: U1.59 13.36,17.27 13.21,17.12 13.21,16.78 v1(13.17,16.74)
N743940: length 3.3
  BOTTOM w0.2: C18.2 17.62,27 R20.1 17.12,26.81 17.13,26.81 R21.2 17.13,25.36 16.58,24.82 U2.5

## Copper pours and planes (outline as drawn; the poured copper is in the pictures)
GND on TOP: 0.5,0.5 0.5,32.2 16.5,32.2 16.5,28.5 39.5,28.5 39.5,0.5 ; 11 cut-outs
GND on BOTTOM: 0.5,0.5 0.5,32.2 16.5,32.2 16.5,28.5 39.5,28.5 39.5,0.5 ; 17 cut-outs
XDSET_VBUS on TOP: 9.59,26.77 9.59,25.47 11.87,25.47 11.87,26.77
XDSET_VBUS on BOTTOM: 10.47,26.7 10.47,25.49 12.22,25.51 13.8,25.51 13.8,27.28 15.05,27.28 15.05,28.23 12.92,28.23 12.92,26.7
XDSET_VCC on BOTTOM: 15.25,27.38 15.25,28.25 18.47,28.25 18.47,27.38

## Text on the board
Ref Des/Silkscreen Bottom: GND
Ref Des/Silkscreen Top: Reset | GROVE1 | A/D | REV: 1.3 | MODEL: Debug DevPack | DP0 | DP1 | DP2 | DP3 | SCL | SDA | GROVE2 | GND
XSECTION_CHART: *  SURFACE - AIR 0 MM | L1: TOP CONDUCTOR - COPPER 0.035 MM | *  DIELECTRIC - FR-4 0.73 MM | L2: BOTTOM CONDUCTOR - COPPER 0.035 MM | DESIGN CROSS SECTION CHART | ___________________________ | TOTAL THICKNESS 0.8 MM
DIMENSION: FIGURE | SIZE | 0.2 | 0.65 | 0.75 | 0.9 | 1.0 | DRILL CHART: TOP to BOTTOM | ALL UNITS ARE IN MILLIMETERS | PLATED | NON-PLATED | QTY | 225 | 10 | 20 | 4 | 3
